# Altium PCB FAN7688.PcbDoc
Units mm, origin at the board's own origin, x right, y up, seen from the top; angles counter-clockwise.
Board outline 121 x 90 mm, 2 copper layers (Top Layer, Bottom Layer); 73 components, 45 nets, 221 pads, 47 vias.
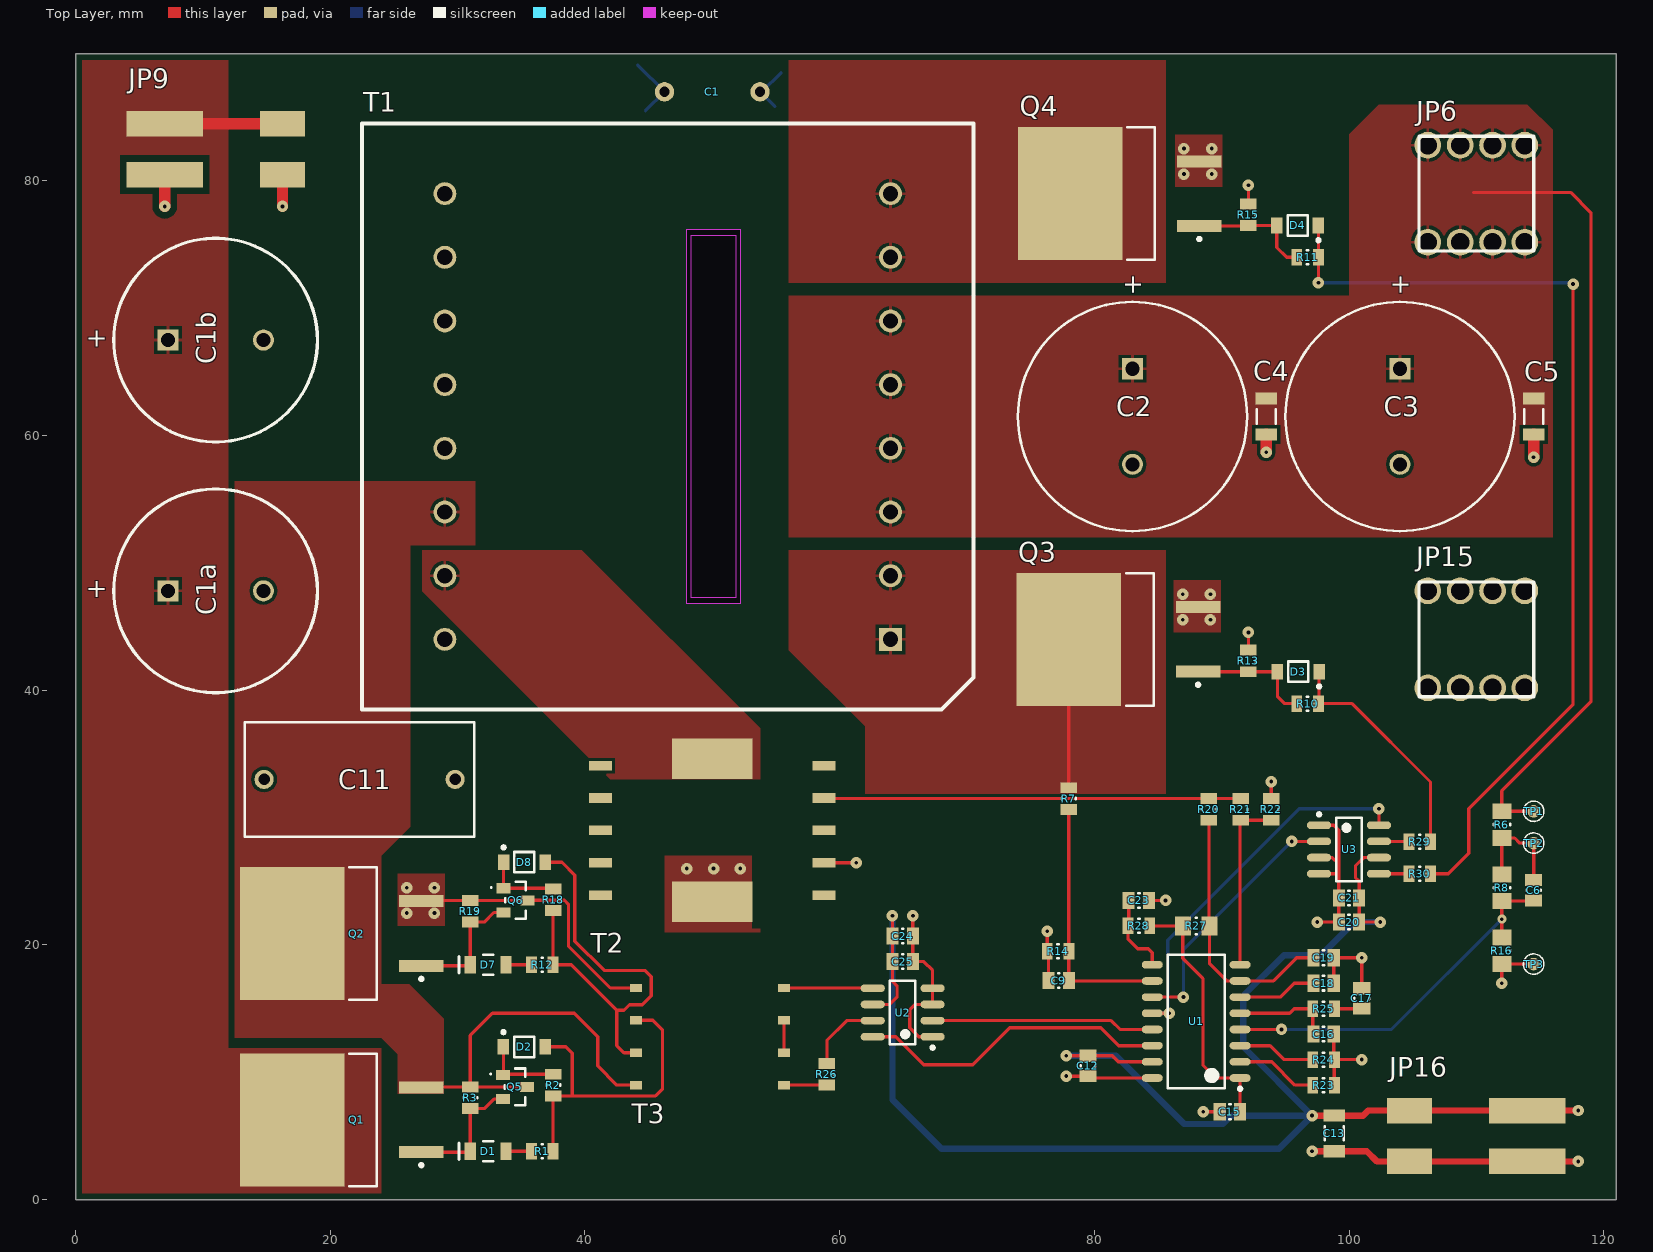
[diagram p0: Top Layer view]
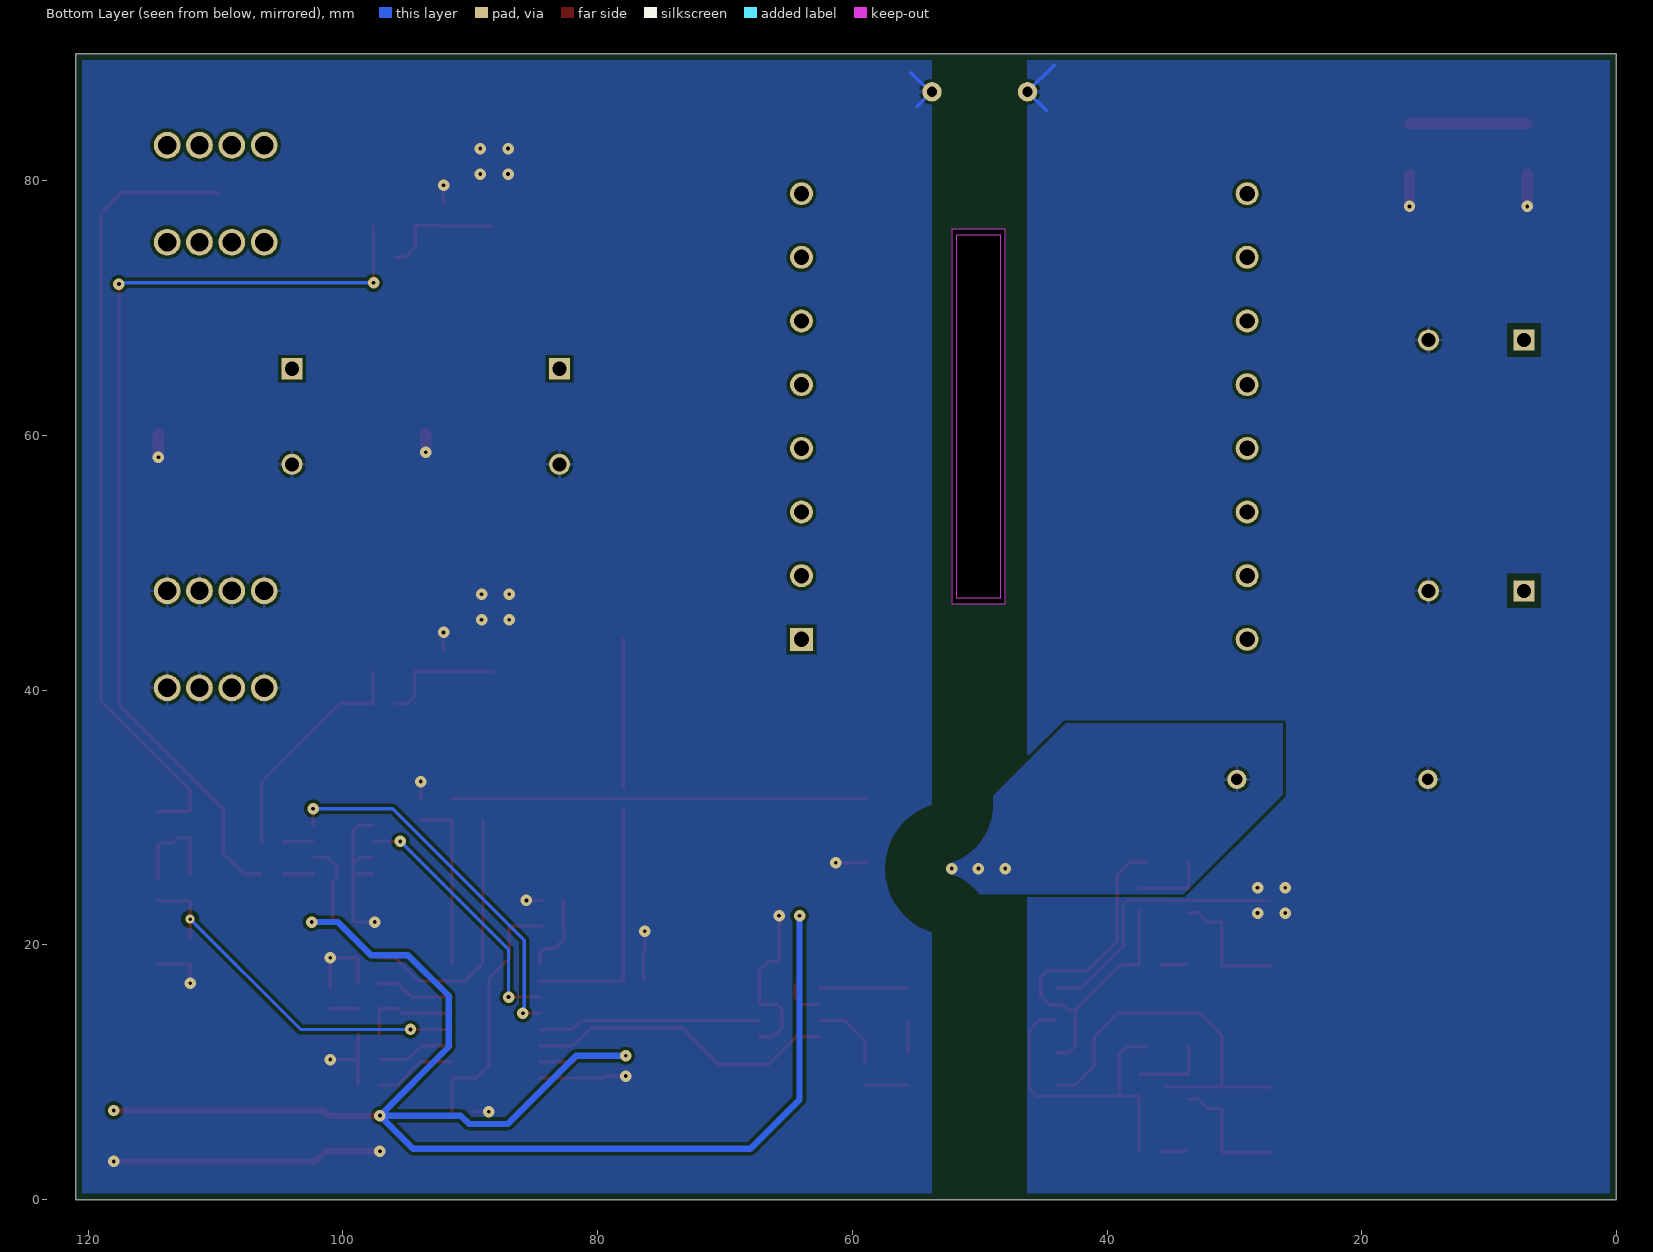
[diagram p1: Bottom Layer view, seen from below]
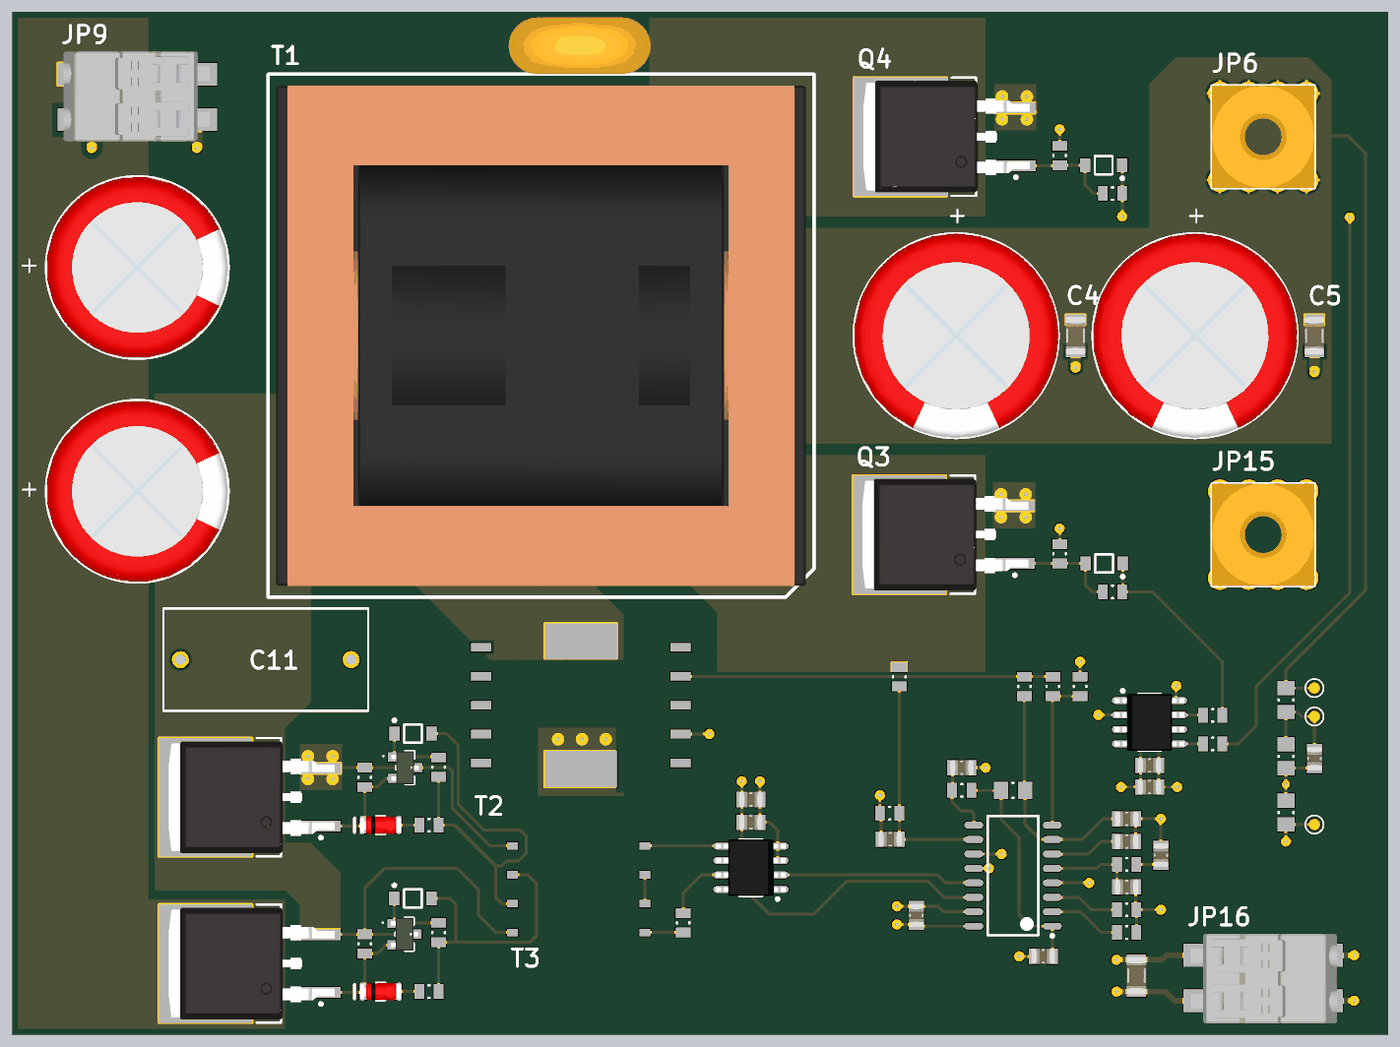
[diagram p2: 3D render of the assembled board from above, using the file's embedded part models]

## Layer stack, top to bottom
Top Solder: solder mask 0.0102, Solder Resist, Dk 3.5
Top Layer: signal copper 0.0356
Dielectric 1: dielectric 0.32, FR-4, Dk 4.8
Bottom Layer: signal copper 0.0356
Bottom Solder: solder mask 0.0102, Solder Resist, Dk 3.5

## Board outline
0,0 121,0 121,90 0,90
cut-out: 48,76.19 52.19,76.19 52.19,46.81 48,46.81 48,76.19

## Design rules (kind name [scope] priority, off if disabled: settings)
BoardOutlineClearance [All] p1: gap=0.5 ignorepadtopadclearanceinfootprint=FALSE
Clearance Clearance_1 [InNet('NetC11_2') vs InNet('GND')] p1: gap=4.8 ignorepadtopadclearanceinfootprint=FALSE
Clearance Clearance_2 [InNet('B+')] p2: gap=0.5 ignorepadtopadclearanceinfootprint=FALSE
Clearance Clearance_4 [InNet('SH') vs InNet('B+')] p3: gap=0.5 ignorepadtopadclearanceinfootprint=FALSE
Clearance [All] p4: gap=0.254 ignorepadtopadclearanceinfootprint=FALSE except(0: Arc-Hole Track-Hole SMDPad-Hole THPad-Hole Via-Hole Fill-Hole Poly-Hole Region-Hole Text-Hole)
Height [All] p1: minheight=0 maxheight=40 prefheight=12.7
MinimumSolderMaskSliver [All] p1: minsoldermaskwidth=0.15
PolygonConnect [All] p1: thpad.connectstyle=Relief thpad.reliefconductorwidth=0.254 thpad.reliefentries=4 thpad.polygonreliefangle="90 Angle" thpad.airgapwidth=0.254 smdpad.connectstyle=Direct smdpad.reliefconductorwidth=0.254 smdpad.reliefentries=4 smdpad.polygonreliefangle="90 Angle" smdpad.airgapwidth=0.254 via.connectstyle=Direct via.reliefconductorwidth=0.254 via.reliefentries=4 via.polygonreliefangle="90 Angle" via.airgapwidth=0.254
RoutingVias [All] p1: holewidth=0.5 width=0.9 viastyle="Through Hole" minholewidth=0.3 minwidth=0.9 maxholewidth=0.5 maxwidth=1.1
SilkToSilkClearance [All] p1: silktosilkclearance=0.15
SilkToSolderMaskClearance SilkToSolderMaskClearance_WE [IsPad vs HasFootprint('7460307')] p1: minsilkscreentomaskgap=0 clearancetoexposedcopper=TRUE
SilkToSolderMaskClearance SilkToSolderMaskClearance_1 [IsPad] p2: minsilkscreentomaskgap=0.15 clearancetoexposedcopper=TRUE
SolderMaskExpansion [All] p1: expansion=0.102
Width [All] p1: maxlimit=1 minlimit=0.254 preferedwidth=0.254
26 further rules are at their usual default settings.

## Components (designator, comment, footprint, x,y, rotation, side; value= is the part's Value field where it differs from the comment)
C1 "VY2472M49Y5US63V7" CAP_VY2472M49Y5US63V7 50,87 r0 top value=4700pF
C1a "860241480001" WCAP-AT1H_16x35.5x7.5 11,47.81 r180 top value=100uF
C1b "860241480001" WCAP-AT1H_16x35.5x7.5 11,67.5 r180 top value=100uF
C2 "63 Vdc, 1.5 mF" WCAP-ATG5_18x31.5x7.5 83,61.5 r90 top value="1.5 mF"
C3 "63 Vdc, 1.5 mF" WCAP-ATG5_18x31.5x7.5 104,61.5 r90 top value="1.5 mF"
C4 "CAP" CAPC1206(3216)75_L 93.5,61.5 r90 top value=100nF
C5 "CAP" CAPC1206(3216)75_L 114.5,61.5 r90 top value=100nF
C6 "CAP" CAPC0805(2012)75_L 114.5,24.3 r90 top value=47nF
C9 "CAP" CAPC0805(2012)75_L 77.2,17.2 r0 top value=33pF
C11 "B32672L8153J000" CAP_RM15_W9L18 22.3,33 r0 top value=15nF
C12 "CAP" CAPC0805(2012)75_L 79.5,10.5 r90 top value=100nF
C13 "CAP" CAPC1206(3216)75_L 98.85,5.2 r90 top value=22uF
C15 "CAP" CAPC0805(2012)75_L 90.65,6.9 r180 top value=100nF
C16 "CAP" CAPC0805(2012)75_L 98,13 r180 top value=470pF
C17 "CAP" CAPC0805(2012)75_L 101,15.8 r270 top value=470pF
C18 "CAP" CAPC0805(2012)75_L 98,17 r180 top value=820nF
C19 "CAP" CAPC0805(2012)75_L 98,19 r180 top value=1nF
C20 "CAP" CAPC0805(2012)75_L 100,21.8 r0 top value=10uF
C21 "CAP" CAPC0805(2012)75_L 100,23.7 r0 top value=100nF
C23 "CAP" CAPC0805(2012)75_L 83.5,23.5 r180 top value=470pF
C24 "CAP" CAPC0805(2012)75_L 64.95,20.695 r180 top value=10uF
C25 "CAP" CAPC0805(2012)75_L 64.95,18.695 r180 top value=100nF
D1 "LL4148" DIOD-SOD-80 32.4,3.8 r180 top
D2 "MBR0540T1G" ONSC-SOD-123-2-425-04_V 35.235,12 r0 top
D3 "MBR0540T1G" ONSC-SOD-123-2-425-04_V 96.015,41.46 r180 top
D4 "MBR0540T1G" ONSC-SOD-123-2-425-04_V 95.965,76.5 r180 top
D7 "LL4148" DIOD-SOD-80 32.4,18.445 r180 top
D8 "MBR0540T1G" ONSC-SOD-123-2-425-04_V 35.245,26.5 r0 top
JP6 "7460307" 7460307 110,79 r0 top
JP9 "LiteTrap" CONN_MiniLite 11,82.5 r180 top
JP15 "7460307" 7460307 110,44 r0 top
JP16 "LiteTrap" CONN_MiniLite 110,5 r0 top
Q1 "NTB082N65S3F" D2PAK_L 20.9,6.27 r180 top
Q2 "NTB082N65S3F" D2PAK_L 20.9,20.9 r180 top
Q3 "FDB075N15A" D2PAK_L 81.9,44 r180 top
Q4 "FDB075N15A" D2PAK_L 82,79 r180 top
Q5 "ZXTP19060CFFTA" DIOD-SOT23F-3_V 34.5,8.85 r0 top
Q6 "ZXTP19060CFFTA" DIOD-SOT23F-3_V 34.555,23.5 r0 top
R1 "RES" RESC0805(2012)_L 36.65,3.8 r180 top value=4R99
R2 "RES" RESC0805(2012)_L 37.5,9 r270 top value=309R
R3 "RES" RESC0805(2012)_L 31,8 r270 top value=20K
R6 "RES" RESC0805(2012)_M 112,29.45 r90 top value=49R9
R7 "RES" RESC0805(2012)_L 78,31.5 r90 top value=68K
R8 "RES" RESC0805(2012)_M 112,24.5 r90 top value=39K
R10 "RES" RESC0805(2012)_L 96.75,38.96 r0 top value=4R99
R11 "RES" RESC0805(2012)_L 96.75,74 r0 top value=4R99
R12 "RES" RESC0805(2012)_L 36.65,18.445 r180 top value=4R99
R13 "RES" RESC0805(2012)_L 92.1,42.31 r270 top value=20K
R14 "RES" RESC0805(2012)_L 77.15,19.5 r0 top value=2K7
R15 "RES" RESC0805(2012)_L 92.1,77.35 r270 top value=20K
R16 "RES" RESC0805(2012)_M 112,19.55 r90 top value=2K
R18 "RES" RESC0805(2012)_L 37.5,23.55 r270 top value=309R
R19 "RES" RESC0805(2012)_L 31,22.65 r270 top value=20K
R20 "RES" RESC0805(2012)_L 89,30.65 r270 top value=66191
R21 "RES" RESC0805(2012)_L 91.5,30.65 r90 top value=100R
R22 "RES" RESC0805(2012)_L 93.9,30.65 r270 top value=31R8
R23 "RES" RESC0805(2012)_L 98,9 r180 top value=1M
R24 "RES" RESC0805(2012)_L 98,11 r180 top value=15K
R25 "RES" RESC0805(2012)_L 98,15 r180 top value=43K
R26 "RES" RESC0805(2012)_L 59,9.85 r270 top value=3R3
R27 "RES" RESC0805(2012)_M 88,21.5 r180 top value=200K
R28 "RES" RESC0805(2012)_L 83.5,21.5 r0 top value=43K
R29 "RES" RESC0805(2012)_L 105.55,28.1 r180 top value=2R49
R30 "RES" RESC0805(2012)_L 105.55,25.595 r180 top value=2R49
T1 "760895751" WE-LLCR_ETD44 46.5,61.5 r180 top
T2 "750316793" WE_750316793 50,29 r180 top
T3 "WE750316093" WE_750316093 49.82,12.81 r0 top
TP1 "MECH_Testpoint" MECH_TP_39_mil 114.5,30.5 r0 top
TP2 "MECH_Testpoint" MECH_TP_39_mil 114.5,28 r90 top
TP3 "MECH_Testpoint" MECH_TP_39_mil 114.5,18.5 r90 top
U1 "FAN7688" ONSC-SOEIAJ-16-966-01_L 88,14 r180 top
U2 "FAN3225CMX" SOIC8_L 64.95,14.695 r180 top
U3 "FAN3225CMX" SOIC8_L 100,27.5 r0 top

## Footprints (in the part's own frame and the unit in brackets; to place one, negate y for a bottom-side part, rotate by r counter-clockwise, add the part's x,y. Pads: shape width x height; smd on the part's side, far side on the other; paste and mask are expansions set on the pad)
7460307 [mm] "WP-BUTR Bushes with two Rows Pin-Plate, M4, blind thr 6mm"
  round 2.1 hole 1.45: 1(-3.81,-3.81) 1(-3.81,3.81) 1(-1.27,-3.81) 1(-1.27,3.81) 1(1.27,-3.81) 1(1.27,3.81) 1(3.81,-3.81) 1(3.81,3.81)
  silkscreen extent -4.5,-4.5 4.5,4.5, body extent -4.5,-4.5 4.5,4.5, height 7.05
CAP_RM15_W9L18 [mm] "CAP RM15 width 9, height 17.5, length 18"
  round 1.5 hole 0.9: 1(-7.5,0) 2(7.5,0)
  silkscreen extent -9,-4.5 9,4.5, body extent -9,-4.5 9,4.5, height 17.5
CAP_VY2472M49Y5US63V7 [mm] "X,Y CAP"
  round 1.524 hole 0.8: 1(-3.75,0) 2(3.75,0)
  body extent -6.35,-2.5 6.15,2.5, height 16.24
CAPC0805(2012)75_L [mm] "Chip Capacitor, Body 2.0x1.2mm, Height 0.75mm, IPC High Density"
  rect 0.95x1.35 smd: 1(-0.8,0) 2(0.8,0)
  silkscreen extent -0.05,-0.58 0.05,0.58, body extent -1.05,-0.68 1.05,0.68, height 0.75
CAPC1206(3216)75_L [mm] "Chip Capacitor, Body 3.2x1.6mm, Height 0.75mm, IPC High Density"
  rect 0.95x1.7 smd: 1(-1.4,0) 2(1.4,0)
  silkscreen extent -0.55,-0.75 0.55,0.75, body extent -1.68,-0.88 1.68,0.87, height 1
CONN_MiniLite [mm] "CONN SSL RCPT 2POS 4MM SOLDER"
  rect 3.5x2 smd: 1(-5.25,-2) 2(-5.25,2)
  rect 6x2 smd: 1(4,-2) 2(4,2)
  body extent -6.5,-4 6.5,3.9, height 4.25
D2PAK_L [mm] "D2-PAK, 4-Leads, Body 9.2x10.2mm, Pitch 2.54mm, Lead Span 15.4mm, IPC High Density"
  rect 3.5x0.95 smd: 1(-6.25,2.54) 3(-6.25,-2.54)
  rect 8.2x10.45 smd: 4(3.9,0)
  silkscreen extent -6.38,-5.2 -0.6,5.2, body extent -7.46,-4.91 7.14,4.91, height 4.22
DIOD-SOD-80 [mm]
  rect 0.9x1.4 smd: 1(-1.4,0) 2(1.4,0)
  silkscreen extent -0.4,-0.77 2.3,0.77, body extent -1.85,-0.8 1.85,0.8, height 1.63
DIOD-SOT23F-3_V [mm] "SOTFL, 3-Leads, Body 2.9x1.6mm, Pitch 0.95mm"
  rect 1.11x0.8 smd: 1(-0.945,0.95) 2(-0.945,-0.95) 3(0.945,0)
  silkscreen extent -1.96,-1.45 0.8,1.45, body extent -1.2,-1.45 1.2,1.45, height 1
MECH_TP_39_mil [mil]
  round 39 smd paste-78.74: 1(0,0)
  silkscreen extent -31,-31 32,31
ONSC-SOD-123-2-425-04_V [mm] "SOD, 2-Leads, Body 2.69x1.6mm"
  rect 0.91x1.22 smd: 1(-1.635,0) 2(1.635,0)
  silkscreen extent -1.76,-0.8 0.78,1.28, body extent -1.35,-0.8 1.35,0.8, height 1.35
ONSC-SOEIAJ-16-966-01_L [mm] "SOIC, 16-Leads, Body 10.5x5.45mm, Pitch 1.27mm, IPC High Density"
  oval 1.65x0.6 smd: 1(-3.45,4.445) 2(-3.45,3.175) 3(-3.45,1.905) 4(-3.45,0.635) 5(-3.45,-0.635) 6(-3.45,-1.905) 7(-3.45,-3.175) 8(-3.45,-4.445) 9(3.45,-4.445) 10(3.45,-3.175) 11(3.45,-1.905) 12(3.45,-0.635) 13(3.45,0.635) 14(3.45,1.905) 15(3.45,3.175) 16(3.45,4.445)
  silkscreen extent -3.58,-5.25 2.22,5.42, body extent -2.73,-5.25 2.73,5.25, height 2.05
RESC0805(2012)_L [mm] "Chip Resistor, Body 2.0x1.3mm, IPC High Density"
  rect 0.85x1.3 smd: 1(-0.85,0) 2(0.85,0)
  silkscreen extent -0.05,-0.55 0.05,0.55, body extent -1.1,-0.67 1.1,0.68, height 0.7
RESC0805(2012)_M [mm] "Chip Resistor, Body 2.0x1.3mm, IPC Low Density"
  rect 1.25x1.5 smd: 1(-1.05,0) 2(1.05,0)
  silkscreen extent -0.05,-0.65 0.05,0.65, body extent -1.1,-0.67 1.1,0.67, height 0.7
SOIC8_L [mm] "SOIC, 8-Leads, Body 4.9x3.9mm, Pitch 1.27mm, IPC High Density"
  oval 1.9x0.6 smd: 1(-2.35,1.905) 2(-2.35,0.635) 3(-2.35,-0.635) 4(-2.35,-1.905) 5(2.35,-1.905) 6(2.35,-0.635) 7(2.35,0.635) 8(2.35,1.905)
  silkscreen extent -2.48,-2.5 1,2.88, body extent -3.08,-2.5 3.08,2.5, height 2
WCAP-AT1H_16x35.5x7.5 [mm] "Aluminium Electrolytic Radial THD Capacitors, §¶16x35.5mm"
  rect 1.65x1.65 hole 1.1: 1(3.75,0)
  round 1.65 hole 1.1: 2(-3.75,0)
  silkscreen extent -8,-8 8,8, body extent -7.99,-8 8,8, height 35.76
WCAP-ATG5_18x31.5x7.5 [mm] "Aluminum Electrolytic Capacitors, 18x31.5mm"
  rect 1.65x1.65 hole 1.1: 1(3.75,0)
  round 1.65 hole 1.1: 2(-3.75,0)
  silkscreen extent -9,-9 9,9, body extent -8.99,-9 9,9, height 31.81
WE-LLCR_ETD44 [mm] "Resonant Converter, body 48x46"
  rect 1.8x1.8 hole 1.2: 1(-17.5,17.5)
  round 1.8 hole 1.2: 2(-17.5,12.5) 3(-17.5,7.5) 4(-17.5,2.5) 5(-17.5,-2.5) 6(-17.5,-7.5) 7(-17.5,-12.5) 8(-17.5,-17.5) 9(17.5,-17.5) 10(17.5,-12.5) 11(17.5,-7.5) 12(17.5,-2.5) 13(17.5,2.5) 14(17.5,7.5) 15(17.5,12.5) 16(17.5,17.5)
  Keep-Out Layer board cut-out: -5.35,14.25 -1.85,14.25 -1.85,-14.25 -5.35,-14.25
  silkscreen extent -24,-23 24,23, body extent -23.3,-22 23.3,22, height 26.85
WE_750316093 [mm]
  rect 0.96x0.66 smd: 1(-5.82,3.81) 2(-5.82,1.27) 3(-5.82,-1.27) 4(-5.82,-3.81) 5(5.82,-3.81) 6(5.82,-1.27) 7(5.82,1.27) 8(5.82,3.81)
  body extent -6,-4.5 6,4.5, height 11.36
WE_750316793 [mm]
  rect 1.78x0.75 smd: 1(-8.775,5.08) 2(-8.775,2.54) 3(-8.775,0) 4(-8.775,-2.54) 5(-8.775,-5.08) 6(8.775,-5.08) 7(8.775,-2.54) 8(8.775,0) 9(8.775,2.54) 10(8.775,5.08)
  rect 6.35x3.17 smd: 11(0,5.62) 12(0,-5.62)

## Part data
C1: library part CAP_VY2_4700, "4700pF ±20% 440VAC Ceramic Capacitor Y5U (E) Radial, Disc", Voltage=440VAC, DigiKey=BC2359-ND, Farnell=1902233, MPN=VY2472M49Y5US63V7, PackageReference=THD
C1a C1b: "WCAP-AT1H Aluminum Electrolytic Capacitors, size ?16x35.5mm, 450V DC, 100uF", Operating Temperature="-25 °C up to +105 °C", Rated Voltage="450V DC", ComponentLink1Description=Manufacturer, ComponentLink1URL=http://www.we-online.de, ComponentLink2Description=Datasheet, ComponentLink2URL=http://katalog.we-online.de/pbs/datasheet/860241480001.pdf, Life Cycle=5000h, Part Number=860241480001, Published Date="June 2017", Publisher="Wurth Elektronik", Size=?16x35.5mm
C2 C3: library part 860020781027, "WCAP-ATG5 Aluminum Electrolytic Capacitors, 18x31.5mm, 63 Vdc, 1.5 mF", Operating Temperature="-40 °C up to +105 °C", Rated Voltage="63 Vdc", ComponentLink1Description=Manufacturer, ComponentLink1URL=http://www.we-online.de, ComponentLink2Description=Datasheet, ComponentLink2URL=http://katalog.we-online.com/pbs/datasheet/860020781027.pdf, Life Cycle=2000h, Part Number=860020781027, Published Date="Sep. 2017", Publisher="Wurth Elektronik", Size=18x31.5mm
C4 C5 C6 C9 C12 C13 C15 C16 C17 C18 C19 C20 C21 C23 C24 C25: "Generic capacitor non polarised"
C11: library part CAP_MKP_B32672L8153J000, "0.015µF Film Capacitor 700V 2000V (2kV) Polypropylene (PP), Metallized Radial", Voltage=2kV, DigiKey=495-3234-ND, Farnell=2469018, MPN=B32672L8153J000, PackageReference=RM15
D1 D7: library part DIOD_GP_LL4148, "DIODE GEN PURP 100V 200MA SOD80", Code_JEDEC=SOD-80, DigiKey=LL4148FSTR-ND, Farnell=2101203, MPN=LL4148
D2 D3 D4 D8: library part CMP-1055-00401-1, "Schottky Power Rectifier, 2-Pin SOD-123, Pb-Free, Tape and Reel", Manufacturer="On Semiconductor", ComponentLink1Description="Manufacturer URL", ComponentLink1URL=http://www.onsemi.com/, ComponentLink2Description=Datasheet, ComponentLink2URL=http://www.onsemi.cn/pub_link/Collateral/MBR0540T1-D.PDF, ComponentLink3Description="Package Specification", ComponentLink3URL=http://www.onsemi.com/pub_link/Collateral/425-04.PDF, Configuration=Single, DatasheetVersion="Rev. 7", IFSM Max (A)=5.5, Mounting Technology="Surface Mount", PackageDescription="2-Pin SOD, Body 1.6 x 2.69 mm", PackageReference=SOD-123-2-425-04, PackageVersion="Rev. G, 10/2009", Packing="Tape and Reel", PartNumber=MBR0540T1G, RoHS=TRUE
JP6 JP15: "REDCUBE PRESS-FIT with internal thread, two rows WP-BUTR, M4 - 6 mm", Rated Current="160 A", ComponentLink1Description=Manufacturer, ComponentLink1URL=http://www.we-online.de, ComponentLink2Description=Datasheet, ComponentLink2URL=http://katalog.we-online.de/em/datasheet/7460307.pdf, Part Number=7460307, Pin Number=8, Published Date="March  2017", Publisher="Wurth Elektronik", Thread=M4, Thread Length="6 mm"
JP9 JP16: library part CONN_LiteTrap_2, "CONN SSL RCPT 2POS 4MM SOLDER", MPN=104188-0210, DigiKey=WM10425CT-ND, ELFA=43-808-61, Farnell=2401572
Q1 Q2: library part TRAN_NTB082N65S3F, "N-Channel 650V 40A (Tc) 313W (Tc) Surface Mount D2PAK (TO-263)", MPN=NTB082N65S3F
Q3 Q4: library part TRAN_FDB075N15A, "N-Channel 150V 110A (Tc) 333W (Tc) Surface Mount D2PAK (TO-263)", MPN=FDB075N15A
Q5 Q6: library part TRAN_ZXTP19060CFFTA, "Bipolar (BJT) Transistor PNP 60V 4A 180MHz 1.5W Surface Mount SOT-23F", ComponentLink1Description="Manufacturer Link", ComponentLink1URL=http://www.fairchildsemi.com/, ComponentLink2Description=Datasheet, ComponentLink2URL=http://www.fairchildsemi.com/ds/2N%2F2N3906.pdf, MPN=ZXTP19060CFFTA
R1 R2 R3 R6 R7 R8 R10 R11 R12 R13 R14 R15 R16 R18 R19 R20 R21 R22 R23 R24 R25 R26 R27 R28 R29 R30: "Generic resistor"
T1: "WE-LLCR Resonant Converter, size ETD44, 600uH, 27:6:6:2 , 250W", Inductance=400uH, Input Voltage="360-400 V DC", Output Power=250W, ComponentLink1Description=Manufacturer, ComponentLink1URL=http://www.we-online.de, ComponentLink2Description=Datasheet, ComponentLink2URL=http://katalog.we-online.de/pbs/datasheet/760895751.pdf, Part Number=760895751, Published Date="July 2017", Publisher="Wurth Elektronik", Size=ETD44, Turns Ratio=27:6:6:2
T2: library part TRANS_WE750316793, "MID-SNS Current Sense Transformers", MPN=750316793
T3: library part TRANS_WE750316093, "MID-GDT Gate Drive Transformers", MPN=750316093
TP1 TP2 TP3: "Testpoint"
U1: library part IC-PMIC-FAN7688, "Power Supply Controller Secondary-Side Controller, Synchronous Rectifier 16-SOP", MPN=FAN7688SJX
U2 U3: library part IC-PMIC-FAN3225CMX, "Low-Side Gate Driver IC Inverting, Non-Inverting 8-SOIC", MPN=FAN3225CMX

## Via types
v1: diameter 0.9, hole 0.3, Top Layer to Bottom Layer, 46 vias
v2: diameter 0.7, hole 0.3, Top Layer to Bottom Layer, 1 vias

## Nets (pads, with @x,y where several pads share a name; then routed paths per layer and width w, separated by ;. In a path a pad name is that pad's centre, name@x,y a point inside that pad or via, vN(x,y) a via of type N, cw(c..) or ccw(c..) an arc to the next point about the centre after c; other vN are vias at no path point)
5VB: C15.1 R27.2 R28.2 U1.1 | length 20.2
  Top Layer w0.254: R28.2 R27.2 86.95,18.95 88.525,17.375 88.525,10.575 89.545,9.555 U1.1 C15.1
B+: C1a.1 C1b.1 JP9.1 Q1.4 | length 9.2
  Top Layer w0.9: JP9.1@7,84.5 JP9.1@16.25,84.5
B-: C1.1 C1a.2 C1b.2 C11.1 JP9.2 Q2.3 Q6.3 R19.1 T3.1 | length 31.8
  Top Layer w0.254: Q2.3@27.21,23.5 R19.1 Q6.3 35.5,23.506 38.394,23.506 38.7,23.2 38.7,19.92 42,16.62 T3.1
  Top Layer w0.9: v1(7,78) JP9.2@7,80.5 ; v1(16.25,78) JP9.2@16.25,80.5
  Bottom Layer w0.254: 44.15,89.1 C1.1 ; 44.75,85.5 C1.1 ; C1.1@46.25,86.873 C1.1
  other v1: 26,22.5 28.177,22.5 26,24.5 28.177,24.5
COMP: C16.2 R25.2 U1.5 | length 7.9
  Top Layer w0.254: U1.5 95.335,14.635 95.7,15 R25.2 97.15,13.05 C16.2
CS: R21.1 R22.2 U1.8 | length 13.8
  Top Layer w0.254: U1.8 91.45,29.75 R21.1 R22.2
D1: Q3.4 R7.2 T1.1 T1.2 | length 11.6
  Top Layer w0.254: R7.2 Q3.4
D2: Q4.4 T1.7 T1.8
FB: C6.1 R8.1 R16.2 U1.4 | length 29.5
  Top Layer w0.254: U1.4 v1(94.7,13.365) ; R16.2 v2(112,22.025) R8.1 114.45,23.45 C6.1
  Bottom Layer w0.254: v1(94.7,13.365) 103.34,13.365 v2(112,22.025)
FMIN: R24.2 U1.3 | length 6.2
  Top Layer w0.254: U1.3 93.805,12.095 94.9,11 R24.2
GH: D2.2 R1.1 R2.2 T3.2 | length 25.9
  Top Layer w0.254: D2.2 38.5,12 39,11.5 39,8.15 ; R1.1 R2.2 39,8.15 ; T3.2 45.32,14.08 46.1,13.3 46.1,8.7 45.55,8.15 39,8.15
GL: D8.2 R12.1 R18.2 T3.3 | length 35
  Top Layer w0.254: D8.2 38.2,26.5 39.208,25.492 39.208,20.292 41.5,18 44.7,18 45.2,17.5 45.2,16 44.5,15.3 43.5,15.3 43.066,14.866 42.5,14.866 ; R18.2 R12.1 38.921,18.445 42.5,14.866 ; T3.3 43.06,11.54 42.5,12.1 42.5,14.866
GND: C1.2 C2.2 C3.2 C4.1 C5.1 C9.1 C12.1 C13.1 C15.2 C16.1 C17.1 C18.1 C19.1 C20.1 C21.1 C23.1 C24.1 C25.1 JP15.1 JP16.1 Q3.3 Q4.3 R13.1 R14.1 R15.1 R16.1 R22.1 R23.1 R24.1 T2.2 TP3.1 U1.16 U2.1 U2.3 U2.4 U3.1 U3.3 U3.4 | length 92.7
  Top Layer w0.254: T2.2 v1(61.3,26.46) ; v1(65.75,22.3) C24.1 C25.1 66.605,18.695 67.3,18 U2.4 U2.3 65.93,15.33 65.5,14.9 65.5,13.5 66.21,12.79 U2.1 ; v1(76.3,21.075) R14.1 76.4,19.4 C9.1 ; v1(77.8,9.7) C12.1 79.645,9.555 U1.16 ; C23.1 v1(85.6,23.5) ; v1(88.55,6.9) C15.2 ; R13.1 v1(92.1,44.54) ; R15.1 v1(92.1,79.66) ; R22.1 v1(93.9,32.825) ; v1(97.5,21.8) C20.1 C21.1 99.2,25.695 ; U3.4 99.1,25.595 99.2,25.695 ; U3.3 98.695,26.865 99.2,26.36 ; U3.1 98.795,29.405 99.2,29 99.2,26.36 ; C16.1 98.8,11.05 R24.1 ; C18.1 C19.1 v1(101,19) C17.1 ; R23.1 R24.1 ; v1(101,11) R24.1 ; v1(112,17) R16.1 TP3.1 ; 99.2,25.695 99.2,26.36
  Top Layer w0.5: v1(97.1,3.8) C13.1 101.4,3.8 102.2,3 104.75,3 114,3 v1(118,3)
  Top Layer w0.9: v1(93.5,58.693) C4.1 ; v1(114.5,58.294) C5.1
  Bottom Layer w0.254: 54.9,85.85 C1.2 53.9,87 55.4,88.5
  other v1: 86.94,45.54 89.117,45.54 86.94,47.54 89.117,47.54 87.04,80.54 89.217,80.54 87.04,82.54 89.217,82.54
ICS: C19.2 R20.2 R27.1 U1.7 | length 20.8
  Top Layer w0.254: R20.2 89,21.55 R27.1 89.05,18.525 90.4,17.175 92.6,17.175 94.075,17.175 95.9,19 C19.2
NetC6_2: C6.2 R6.1 R8.2 TP2.1 | length 8.4
  Top Layer w0.254: R8.2 R6.1 113,28.4 113.4,28 TP2.1 C6.2
NetC11_2: C11.2 T2.11
  other v1: 48,26 50.1,26 52.19,26
NetC17_2: C17.2 R25.1 | length 2.2
  Top Layer w0.254: R25.1 C17.2
NetD1_1: D1.1 R1.2 | length 2
  Top Layer w0.254: D1.1 R1.2@35.8,3.8
NetD1_2: D1.2 Q1.1 Q5.2 R3.2 | length 10.1
  Top Layer w0.254: Q1.1 30.93,3.73 D1.2 R3.2 32.1,7.15 32.85,7.9 Q5.2
NetD2_1: D2.1 Q5.1 R2.1 | length 6.1
  Top Layer w0.254: Q5.1 Q5.1@33.6,9.845 ; D2.1 Q5.1@33.6,9.845 ; R2.1 33.605,9.85 Q5.1@33.6,9.845
NetD3_2: D3.2 Q3.1 R10.1 R13.2 | length 9.9
  Top Layer w0.254: Q3.1 R13.2 D3.2 94.38,39.52 94.94,38.96 R10.1
NetD4_2: D4.2 Q4.1 R11.1 R15.2 | length 9.7
  Top Layer w0.254: Q4.1 92.06,76.46 R15.2 D4.2 94.33,74.77 95.1,74 R11.1
NetD7_1: D7.1 R12.2 | length 2
  Top Layer w0.254: D7.1 R12.2
NetD7_2: D7.2 Q2.1 Q6.2 R19.2 | length 10.2
  Top Layer w0.254: Q2.1 30.915,18.36 D7.2 R19.2 32.1,21.8 32.85,22.55 Q6.2
NetD8_1: D8.1 Q6.1 R18.1 | length 6
  Top Layer w0.254: D8.1 Q6.1 37.45,24.45 R18.1
NetR20_1: R20.1 R21.2 T2.4 | length 32.7
  Top Layer w0.254: T2.4 58.815,31.5 R20.1 R21.2
NetR26_1: R26.1 U2.7 | length 6
  Top Layer w0.254: R26.1 59,12.5 60.56,14.06 U2.7
NetR26_2: R26.2 T3.5 | length 3.4
  Top Layer w0.254: T3.5 R26.2
NetR29_2: R29.2 U3.7 | length 2.4
  Top Layer w0.254: U3.7 104.665,28.135 R29.2
NetR30_2: R30.2 U3.5 | length 2.3
  Top Layer w0.254: U3.5 R30.2
NetT1_15: T1.15 T2.12
NetT3_6: T3.6 T3.7 | length 2.5
  Top Layer w0.254: T3.6 T3.7
NetT3_8: T3.8 U2.5 | length 7
  Top Layer w0.254: T3.8 62.58,16.62 U2.5
PROUT1: U1.14 U2.8 | length 24.6
  Top Layer w0.254: U2.8 64.41,12.79 66.6,10.6 70.46,10.6 73.36,13.5 80.5,13.5 81.905,12.095 U1.14
PROUT2: U1.13 U2.2 | length 17.5
  Top Layer w0.254: U2.2 81.32,14.06 82.015,13.365 U1.13
PWMS: R23.2 U1.2 | length 6.5
  Top Layer w0.254: U1.2 93.93,10.825 95.755,9 R23.2
RDT: C23.2 R28.1 U1.9 | length 6.4
  Top Layer w0.254: C23.2 82.7,21.55 R28.1 82.65,20.45 83.4,19.7 84.25,19.7 84.55,19.4 U1.9
SH: Q1.3 Q2.4 Q5.3 R3.1 T1.14 T3.4 | length 29.8
  Top Layer w0.254: Q1.3 27.19,8.85 R3.1 ; Q5.3 R3.1 ; T3.4 42.5,9 41,10.5 41,12.8 39.165,14.635 32.735,14.635 31,12.9 R3.1
SR1DS: C9.2 R7.1 R14.2 U1.10 | length 20
  Top Layer w0.254: R7.1 R14.2 C9.2 78.025,17.175 U1.10
SR1G: D3.1 R10.2 R29.1 | length 18.6
  Top Layer w0.254: D3.1 97.65,39.01 R10.2 100.24,38.96 106.4,32.8 R29.1
SR2G: D4.1 R11.2 R30.1 | length 76.3
  Top Layer w0.254: v1(97.6,72) R11.2 D4.1 ; R30.1 107.795,25.595 109.4,27.2 109.4,30.7 117.6,38.9 v1(117.6,71.9)
  Bottom Layer w0.254: v1(97.6,72) 117.5,72 v1(117.6,71.9)
SROUT1: U1.12 U3.8 | length 29.1
  Top Layer w0.254: U1.12 v1(85.874,14.635) ; U3.8 v1(102.35,30.7)
  Bottom Layer w0.254: v1@85.874,14.814 85.774,14.914 85.774,20.374 96.1,30.7 v1(102.35,30.7)
SROUT2: U1.11 U3.2 | length 20.4
  Top Layer w0.254: U1.11 v1(87,15.905) ; v1(95.5,28.135) U3.2
  Bottom Layer w0.254: v1(87,15.905) 87,19.635 v1(95.5,28.135)
SS: C18.2 U1.6 | length 6.2
  Top Layer w0.254: U1.6 94.605,15.905 95.7,17 C18.2
VDD: C12.2 C13.2 C20.2 C21.2 C24.2 C25.2 JP16.2 U1.15 U2.6 U3.6 | length 141.5
  Top Layer w0.254: U2.6 63.93,15.33 64.5,15.9 64.5,16.8 64.15,17.15 C25.2 C24.2 v1(64.15,22.3) ; v1(77.8,11.3) C12.2 81.4,11.3 81.875,10.825 U1.15 ; U3.6 101.165,26.865 100.5,26.2 100.5,25.3 100.8,25 C21.2 C20.2 v1(102.45,21.8)
  Top Layer w0.5: v1(97.1,6.6) C13.2 101.1,6.6 101.5,7 104.75,7 114,7 v1(118,7)
  Bottom Layer w0.5: v1@64.15,22.177 64.15,7.85 68,4 94.5,4 v1(97.1,6.6) ; v1(77.8,11.3) 81.7,11.3 87.054,5.946 90.095,5.946 90.749,6.6 v1(97.1,6.6) ; v1(102.45,21.8) 100.4,21.8 97.8,19.2 94.9,19.2 91.7,16 91.7,12 v1(97.1,6.6)
VOUT: C2.1 C3.1 C4.2 C5.2 JP6.1 R6.2 T1.3 T1.4 T1.5 T1.6 TP1.1 | length 62.3
  Top Layer w0.254: 109.8,79.1 117.4,79.1 119,77.5 119,39.1 112,32.1 R6.2 TP1.1
pads on no net: T1.9 T1.10 T1.11 T1.12 T1.13 T1.16 T2.1 T2.3 T2.5 T2.6 T2.7 T2.8 T2.9 T2.10

## Polygon pours and split planes (outlines as drawn)
GND on Top Layer "GND_L01_P020" (solid, pour order 20): 86.24,48.635 89.94,48.635 89.94,44.54 86.24,44.54
GND on Top Layer "GND_L01_P018" (solid, pour order 18): 86.34,83.635 90.04,83.635 90.04,79.54 86.34,79.54
B- on Top Layer "B-_L01_P016" (solid, pour order 16): 25.3,25.595 29,25.595 29,21.5 25.3,21.5
SH on Top Layer "SH_L01_P014" (solid, pour order 14): 25.3,8.3 28.9,8.3 28.9,14.2 26.2,16.9 24,16.9 24,12.7 25.3,11.4
SH on Top Layer "SH_L01_P012" (solid, pour order 12): 12.5,56.4 31.4,56.4 31.4,51.4 26.3,51.4 26.3,29.3 24,27 24,12.7 12.5,12.7
NetC11_2 on Top Layer "NETC11_2_L01_P010" (solid, pour order 10): 46.25,21 46.25,27 53.75,27 53.75,21
NetT1_15 on Top Layer "NETT1_15_L01_P008" (solid, pour order 8): 27.21,51 27.21,47.79 42,33 53.75,33 53.75,37 39.75,51
B+ on Top Layer "B+_L01_P006" (solid, pour order 6): 0,90 12,90 12,11.9 24,11.9 24,0 0,0
VOUT on Top Layer "VOUT_L01_P004" (solid, pour order 4): 56,71 100,71 100,83.65 102.35,86 114,86 116,84 116,52 56,52
D1 on Top Layer "D1_L01_P002" (solid, pour order 2): 56,51 85.6,51 85.6,31.5 62,31.5 62,37.16 56,43.16
D2 on Top Layer "D2_L01_P000" (solid, pour order 0): 56,90 56,72 85.6,72 85.6,90
GND on Bottom Layer "GND_L02_P022" (solid, pour order 22): 53.75,90 53.75,0 121,0 121,90
B- on Bottom Layer "B-_L02_P026" (solid, pour order 26): 46.25,90 46.25,0 0,0 0,90
NetC11_2 on Bottom Layer "NETC11_2_L02_P024" (solid, pour order 24): 26.2,37.4 43.25,37.4 53.75,26.9 53.75,24 34,24 26.2,31.8

## Silkscreen, mask and mechanical layers (free items; w line width, h text height)
Mechanical 1:
  lines w0.254: 0,0 0,90 121,90 121,0 0,0 ; 48,46.81 52.19,46.81 52.19,76.19 48,76.19 48,46.81

## Text inside footprints (layer, text, board x,y; h text height)
C1a: Top Overlay "+" at 2.525,48.547 h1.5 r180
C1b: Top Overlay "+" at 2.525,68.237 h1.5 r180
C2: Top Overlay "+" at 83.7,71 h1.5 r90
C3: Top Overlay "+" at 104.7,71 h1.5 r90
T1: Mechanical 15 "PCB Cutout Area" at 49.5,67.5 h2 r270